# EAGLE board Pulse Earing 2 (EAGLE 6.4)
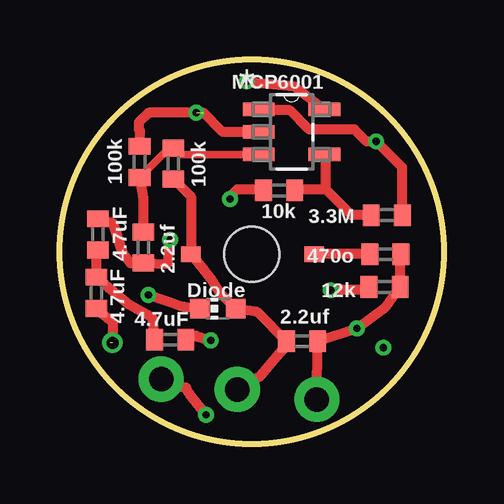
[diagram p0: board, top side]
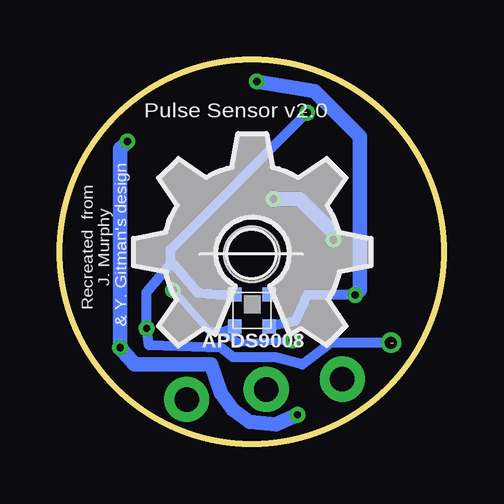
[diagram p1: board, bottom side, seen from below]

Size 16 x 16 mm. Coordinates in mm from the lower left corner, seen from the top.
Outline: circle at 8,8 radius 8
Copper layers (1*16): Top 0.0356mm / dielectric 1.5011mm / Bottom 0.0356mm
Design rules "LaenPCBOrder": minimum track width 6mil, minimum drill 13mil, track to track 6mil, track to pad 6mil, pad to pad 6mil, via to via 6mil, smd to smd 6mil, copper to edge 15mil, drill to drill 6mil, minimum pad ring 7mil, minimum via ring 7mil, stop-mask expansion 4mil, vias tented up to drill 0mil, thermal gap 10mil

## Footprints (pad centres in the part's own frame; a part is rotated, then mirrored left to right if it is on the bottom)
1X01NS = drill 1.016 pad 1.88: 1 0,0
C0402 = smd 0.7 x 0.9: 1 -0.65,0; 2 0.65,0
CHIP-LED0603 = smd 0.8 x 0.8: A 0,-0.75; C 0,0.75
R0402 = smd 0.7 x 0.9: 1 -0.65,0; 2 0.65,0
SOT95P270X145-5N = smd 1.321 x 0.559: 1 -1.372,0.94; 2 -1.372,0; 3 -1.372,-0.94; 4 1.372,-0.94; 5 1.372,0.94
APDS9008 = smd 0.577 x 0.577: GND 0.08,-1.52; NCC1 0.08,-0.08; OUT 1.41,-1.52; VCC 1.41,-0.08
KBREVMNTLED = smd 0.8 x 0.65 bottom: GND 5.144,0; V+ 0,0 | hole 2.3: 2.54,0

## Placement (x,y rotation side)
+V  M01SMDNS  [1X01NS]  7.4,2.25 0 top
C1  2.2uf  [C0402]  10.1,4.27 0 top
C2  4.7uf  [C0402]  4.6,4.34 180 top
C3  4.7uf  [C0402]  1.58,8.73 90 top
C4  2.2uf  [C0402]  3.48,8.18 90 top
C5  4.7uf  [C0402]  1.52,6.29 270 top
GND  M01SMDNS  [1X01NS]  10.71,1.84 0 top
LED1  [CHIP-LED0603]  6.59,5.62 90 top
OUT  M01SMDNS  [1X01NS]  4.22,2.69 0 top
R1  10k  [R0402]  9.14,10.56 0 top
R2  100k  [R0402]  4.73,11.68 270 top
R3  100k  [R0402]  3.32,11.74 270 top
R4  12k  [R0402]  13.53,6.53 180 top
R5  470  [R0402]  13.57,7.9 180 top
R6  3.3m  [R0402]  13.63,9.53 0 top
U$1  MCP6001UT-E/OT  [SOT95P270X145-5N]  9.66,13 0 top
U$2  APDS9008  [APDS9008]  7.19,6.3 270 bottom
U$3  KBREVMTNLED  [KBREVMNTLED]  5.46,7.9 180 bottom
U$4  [OSHW_FILLX350_NOTEXT]  12.93,4.06 0 bottom

## Library data of the parts
+V GND OUT = SparkFun
C1-C5 R1-R6 = resistor
LED1 = led
U$1 = Random parts; MPN: MCP6001UT-E/OT; OC_FARNELL: 1840893; OC_NEWARK: 84R5183; PACKAGE: SOT23-5; SUPPLIER: Microchip
U$2 U$3 = Random parts
U$4 = ohw-logo

## Nets
+V: +V.1 C1.1 LED1.A R2.2 U$3.V+
N$1: LED1.C U$1.5 U$2.VCC
N$2: R1.2 R6.1 U$1.4
N$3: C2.1 R4.2 U$2.OUT
N$4: C2.2 C3.1 C5.1
N$5: C3.2 C4.1 R1.1
N$6: C4.2 R2.1 R3.2 U$1.3
N$7: R5.2 U$3.GND
N$8: C1.2 C5.2 GND.1 R3.1 R4.1 R5.1 U$1.2 U$2.GND
OUT: OUT.1 R6.2 U$1.1

## Tracks (layer width: path | path; a pad name or v marks a point on that pad's centre or on a via)
+V
  Top 0.406: R2.2 5.46,10.3 U$3.V+ 5.49,7.9 6.29,6.9 6.66,6.3 LED1.A 8.24,5.48 C1.1 9.36,4.07 9.29,3.9 8.39,2.85 +V.1
N$1  (via drill 0.3, 0.3 pad 0.3)
  Top 0.406: LED1.C 5.16,5.7 v3.69,6.2 | v7.79,15.1 9.77,14.9 U$1.5
  Bottom 0.406: v3.69,6.2 5.69,6.2 6.19,5.1 U$2.VCC
  Bottom 0.61: v7.79,15.1 5.39,14.7 3.49,12.8 3.49,6.4 v3.69,6.2
N$2
  Top 0.406: R6.1 12.16,9.53 11.09,10.6 | 11.09,10.6 9.84,10.6 R1.2 | 11.09,10.6 11.09,12 U$1.4
N$3  (via drill 0.3)
  Top 0.406: C2.1 5.68,4.5 v6.29,4.3 | R4.2 12.75,6.4 v11.29,6.4
  Bottom 0.305: v6.29,4.3 8.49,4.2 9.29,4.7 | 9.29,4.7 8.87,4.8 | 9.29,4.7 9.79,4.7 v11.29,6.4
  Bottom 0.406: 8.87,4.8 U$2.OUT
N$4
  Top 0.406: C3.1 1.52,8.04 C5.1 2.89,5.8 3.79,5.3 3.85,5.24 C2.2
N$5  (via drill 0.3)
  Top 0.305: 2.93,7.53 C4.1
  Top 0.406: C4.1 4.5,7.5 v4.59,8.5 | R1.1 8.45,10.6 7.39,10.6 7.09,10.3 v7.09,10.2 | C3.2 2.19,9.2 2.59,8 2.93,7.53
  Bottom 0.61: v7.09,10.2 5.99,10.2 4.59,8.8 v4.59,8.5
N$6
  Top 0.305: R3.2 4.56,12.33 R2.1 5,12.06 U$1.3
  Top 0.406: R3.2 3.48,10.24 C4.2
N$7
  Top 0.406: R5.2 U$3.GND
N$8  (via drill 0.3, 0.5)  (2 unrouted)
  Top 0.406: GND.1 C1.2 v12.39,4.8 13.59,5.7 R4.1 R5.1 | U$1.2 6.79,13 5.99,13.8 3.69,13.8 3.29,13.4 3.29,13.1 3.32,13.07 R3.1 | C5.2 2.19,5.07 v2.19,4.2
  Bottom 0.406: 2.09,4.2 4.69,4.2 5.89,3.3 6.99,3.6 8.79,3.6 9.29,4 12.29,4.1 v12.39,4.8 12.39,6.3 11.39,7.5 | 11.39,7.5 11.29,7.5 10.29,6.3 9.29,6.2 U$2.GND | 11.39,7.5 11.39,8.1 v5.69,13.8
OUT  (via drill 0.3, 0.3 pad 0.3)
  Top 0.406: OUT.1 4.69,2.5 5.26,2.33 5.39,2.1 v6.09,1.2 | R6.2 14.28,11.51 v13.19,12.6 12.79,12.6 12.29,13.1 10.39,13.1 9.59,13.9 8.33,13.9 U$1.1
  Bottom 0.406: 13.29,12.5 v13.19,12.6
  Bottom 0.61: v6.09,1.2 6.99,0.8 8.09,0.9 8.79,1.4 9.29,2.1 9.69,3.3 12.89,3.3 v13.49,4 13.49,12.3 13.29,12.5

## Text on the board
_tsilk: MCP6001 | 100k | 100k | 10k | 3.3M | 470o | 4.7uF | 2.2uf | Diode | 12k | 4.7uF | 4.7uF | 2.2uf
_bsilk: Pulse Sensor v2.0 | Recreated from / J. Murphy / & Y. Gitman's design | APDS9008